# EAGLE board Battery_Monitoring_V2 (EAGLE 9.5.1)
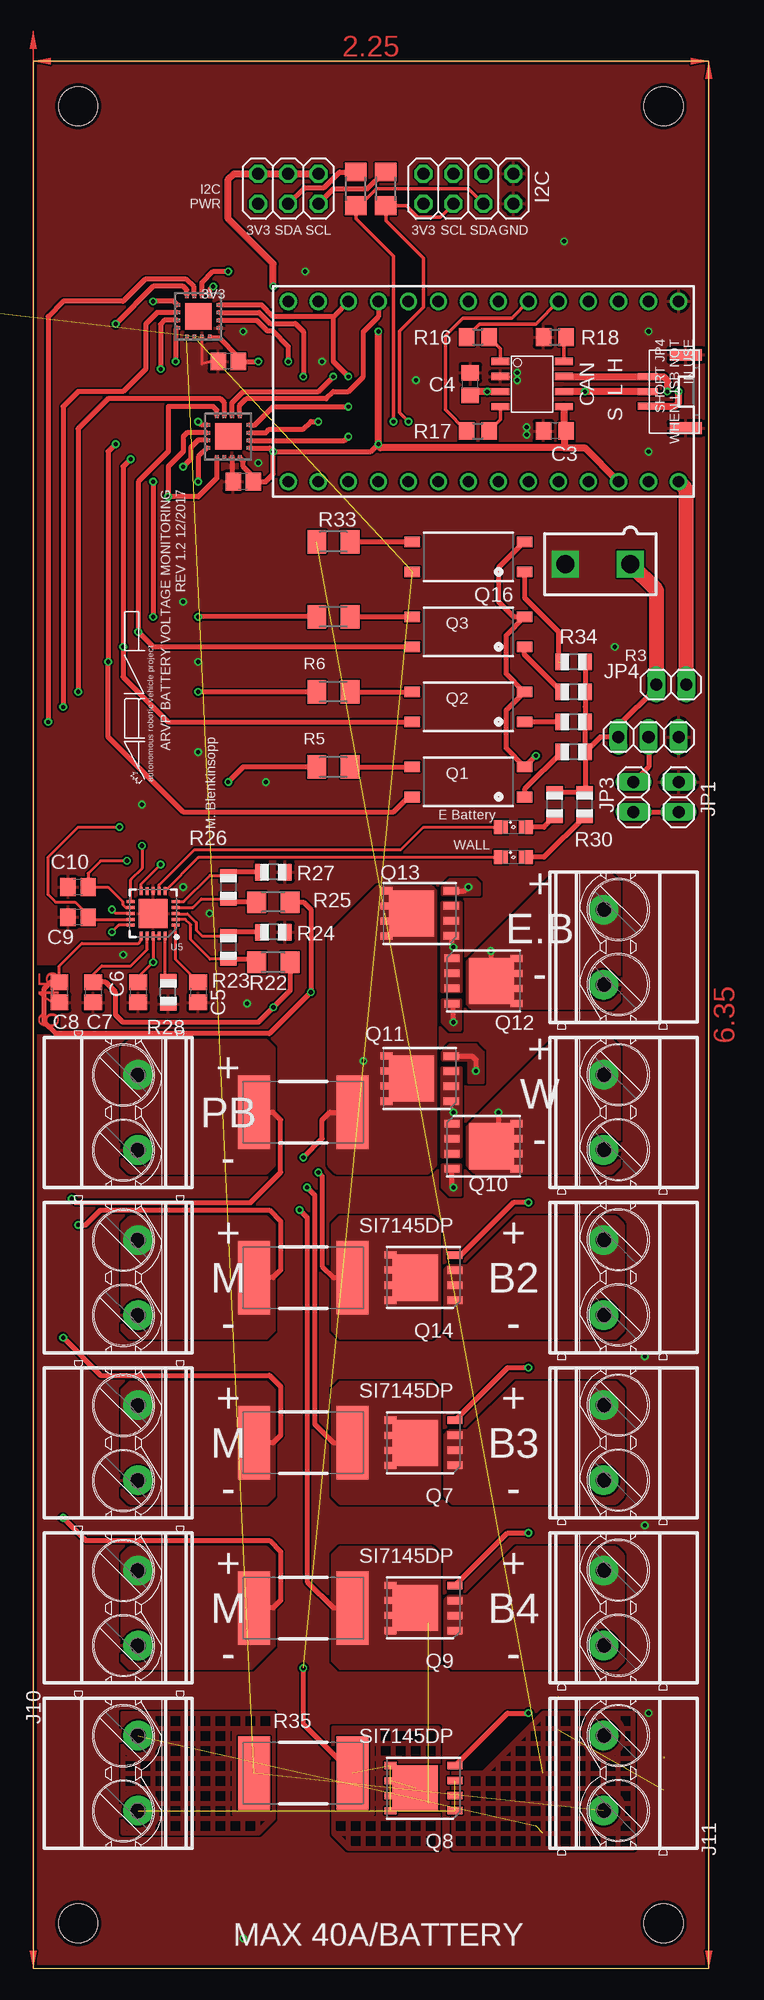
[diagram p0: board, top side]
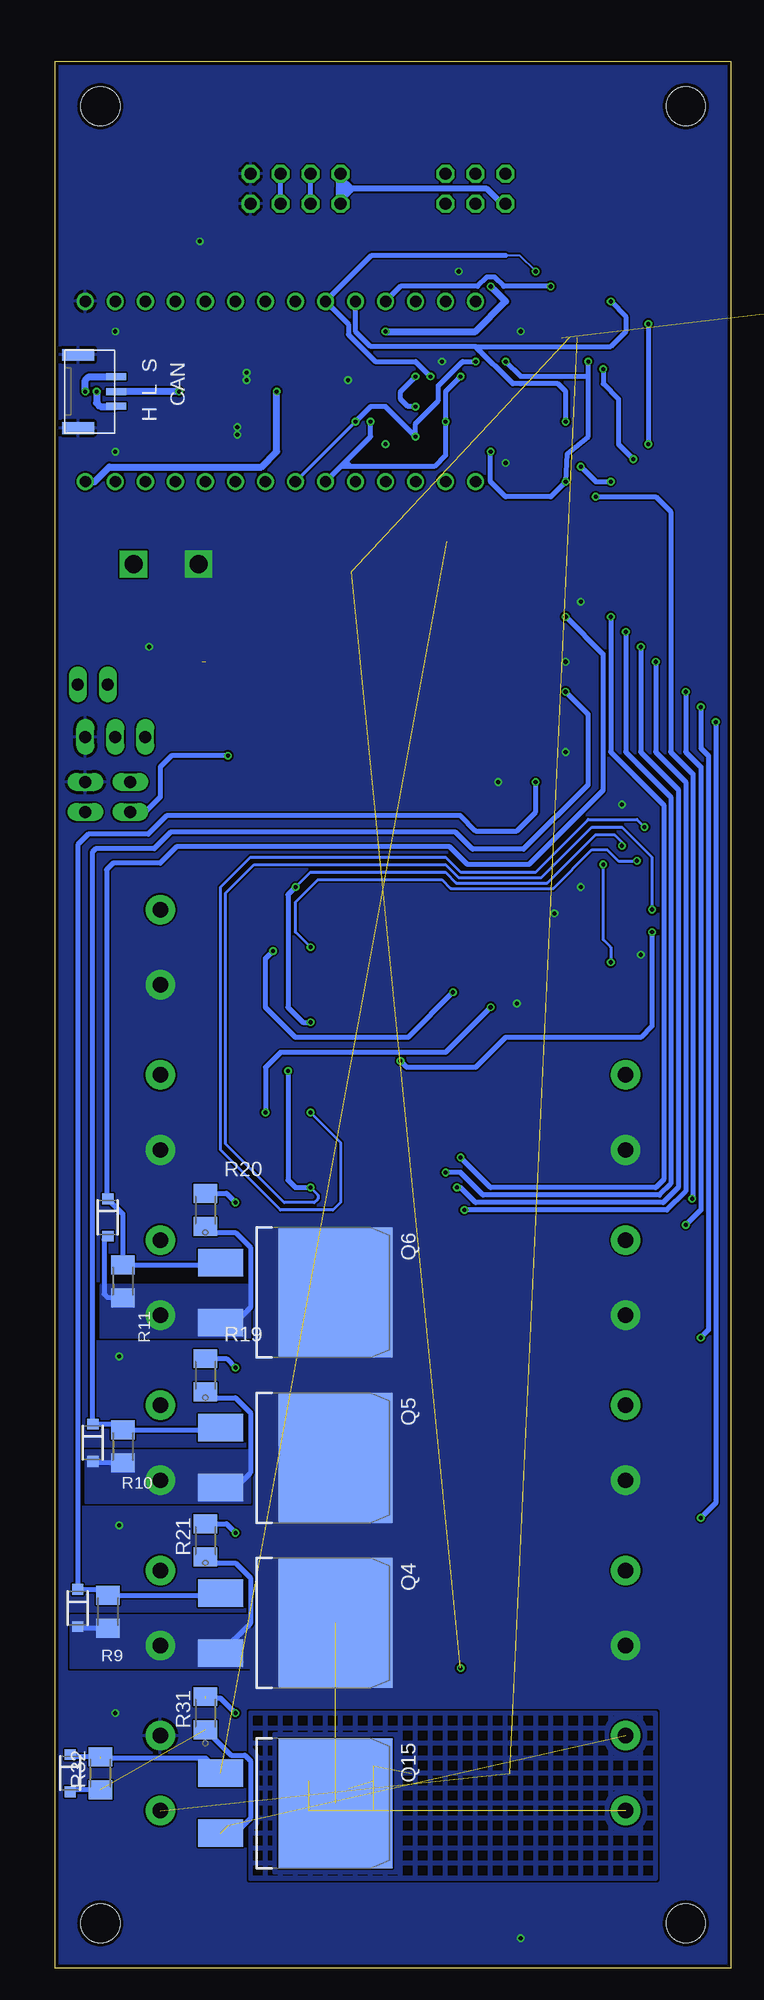
[diagram p1: board, bottom side, seen from below]

Size 57.15 x 161.29 mm. Coordinates in mm from the lower left corner, seen from the top.
Outline: 57.15,0 57.15,161.29 0,161.29 0,0 57.15,0
Copper layers (1+2*15+16): Top 0.035mm / dielectric 1.5mm / Route2 0.035mm / dielectric 0.15mm / Route15 0.035mm / dielectric 0.2mm / Bottom 0.035mm
Design rules "JLCPCB2Layer *": minimum track width 6mil, minimum drill 10mil, track to track 6mil, track to pad 6mil, pad to pad 6mil, via to via 6mil, smd to smd 0mil, copper to edge 10mil, drill to drill 10mil, minimum pad ring 6mil, minimum via ring 6mil, stop-mask expansion 2mil, vias tented up to drill 100mil, thermal gap 10mil
Net classes: 1 net1: clearance 0.203 mm to class 0
Milling: 4 lines

## Footprints (pad centres in the part's own frame; a part is rotated, then mirrored left to right if it is on the bottom)
C2012 = smd 1.3 x 1.5: 1 -0.85,0; 2 0.85,0
C0805 = smd 1.3 x 1.5: 1 -0.95,0; 2 0.95,0
C0805' = smd 1.3 x 1.5: 1 -0.85,0; 2 0.85,0
5566-2 = drill 1.524 square: 1 0,-2.756; 2 0,2.756
SM03B-GHS-TB = smd 0.6 x 1.7: P$1 -1.25,0.85; P$2 0,0.85; P$3 1.25,0.85 | smd 1 x 2.7: P$4 -3.1,-2.35; P$5 3.1,-2.35
SOD-123 = smd 0.9 x 0.95: P$1 -1.575,0; P$2 1.575,0
MKDS_5/2-6,35 = drill 1.3 pad 2.5: 1 -3.175,0; 2 3.175,0
1X02 = drill 1.016 long: 1 -1.27,0; 2 1.27,0
1X03 = drill 1.016 long: 1 -2.54,0; 2 0,0; 3 2.54,0
2X03 = drill 1.016 octagon: 1 -2.54,-1.27; 2 -2.54,1.27; 3 0,-1.27; 4 0,1.27; 5 2.54,-1.27; 6 2.54,1.27
2X04 = drill 1.016 octagon: 1 -3.81,-1.27; 2 -3.81,1.27; 3 -1.27,-1.27; 4 -1.27,1.27; 5 1.27,-1.27; 6 1.27,1.27; 7 3.81,-1.27; 8 3.81,1.27
SML0805 = smd 1.2 x 1.2: A 1.05,0; C -1.05,0
SOP-4L = smd 1.3 x 0.9: P$1 -4.75,1.27; P$2 -4.75,-1.27; P$3 4.75,-1.27; P$4 4.75,1.27
SOT404/D2PAK = smd 2.32 x 3.81: 1G -2.54,-6.32; 3S 2.54,-6.32 | smd 11 x 9.65: 2D 0,3.4
SO-8/PPAK/TEST = smd 1.02 x 0.61: D@1 2.795,-1.905; D@2 2.795,-0.635; D@3 2.795,0.635; D@4 2.795,1.905 | smd 3.81 x 3.91: D@5 0.69,0 | smd 1.27 x 0.635: G -2.67,-1.905; S@1 -2.67,1.905; S@2 -2.67,0.635; S@3 -2.67,-0.635
R0805 = smd 1.1 x 1.4: 1 -1,0; 2 1,0
3920 = smd 2.7 x 6.2: P$1 -4.15,0; P$2 4.15,0
M1206 = smd 1.6 x 2: 1 -1.4,0; 2 1.4,0
R1206 = smd 1.6 x 1.803: 1 -1.422,0; 2 1.422,0
R0805' = smd 1.3 x 1.5: 1 -0.95,0; 2 0.95,0
HVQFN16_4X4 = smd 0.5 x 0.3: 1 -1.8,0.975; 2 -1.8,0.325; 3 -1.8,-0.325; 4 -1.8,-0.975; 9 1.8,-0.975; 10 1.8,-0.325; 11 1.8,0.325; 12 1.8,0.975 | smd 0.3 x 0.5: 5 -0.975,-1.8; 6 -0.325,-1.8; 7 0.325,-1.8; 8 0.975,-1.8; 13 0.975,1.8; 14 0.325,1.8; 15 -0.325,1.8; 16 -0.975,1.8 | smd 2.25 x 2.25: TH 0,0
TEENSY_3.1_BASIC_2 = drill 0.965: 0 -7.62,13.97; 1 -7.62,11.43; 2 -7.62,8.89; 3 -7.62,6.35; 3.3V 7.62,11.43; 4 -7.62,3.81; 5 -7.62,1.27; 6 -7.62,-1.27; 7 -7.62,-3.81; 8 -7.62,-6.35; 9 -7.62,-8.89; 10 -7.62,-11.43; 11 -7.62,-13.97; 12 -7.62,-16.51; 13 7.62,-16.51; 14/A0 7.62,-13.97; 15/A1 7.62,-11.43; 16/A2 7.62,-8.89; 17/A3 7.62,-6.35; 18/A4 7.62,-3.81; 19/A5 7.62,-1.27; 20/A6 7.62,1.27; 21/A7 7.62,3.81; 22/A8 7.62,6.35; 23/A9 7.62,8.89; AGND 7.62,13.97; GND -7.62,16.51; VIN 7.62,16.51
SO-8 = smd 1.524 x 0.61: 1 -2.692,1.905; 2 -2.692,0.635; 3 -2.692,-0.635; 4 -2.692,-1.905; 5 2.692,-1.905; 6 2.692,-0.635; 7 2.692,0.635; 8 2.692,1.905
20-QFN(4X4) = smd 0.25 x 0.7: !SHDN -0.5,1.9; !VALID1 -1,-1.9; !VALID2 -0.5,-1.9; CAS 0.5,-1.9; EN 0,1.9; GND@1 0,-1.9; HYS -1,1.9; INTVCC 1,-1.9; V1 0.5,1.9; V2 1,1.9 | smd 0.7 x 0.25: G1 1.9,0; G2 1.9,-1; OV1 -1.9,0; OV2 -1.9,-1; TMR -1.9,1; UV1 -1.9,0.5; UV2 -1.9,-0.5; VOUT 1.9,1; VS1 1.9,0.5; VS2 1.9,-0.5 | smd 2.45 x 2.45: GND@2 0,0
STAND-OFF = hole 3.302: 0,0

## Placement (x,y rotation side)
ARVP1  ARVP_LOGO  [ARVP]  10.16,100.33 90 top
C1  0.1microF  [C2012]  16.51,135.89 180 top
C2  0.1microF  [C2012]  17.78,125.73 180 top
C3  10u  [C0805]  44.13,130.02 180 top
C4  10u  [C0805]  36.99,133.98 90 top
C5  1n  [C0805']  13.97,82.55 270 top
C6  0.1u  [C0805']  8.89,82.55 270 top
C7  0.1u  [C0805']  5.08,82.55 270 top
C8  0.1u  [C0805']  2.22,82.55 270 top
C9  0.1u  [C0805']  3.81,88.9 180 top
C10  0.1u  [C0805']  3.81,91.44 180 top
CON1  MOLEX_5566-2  [5566-2]  47.78,118.75 90 top
CON2  SM03B-GHS-TB  [SM03B-GHS-TB]  52.86,133.35 90 top
CON3  SM03B-GHS-TB  [SM03B-GHS-TB]  52.86,133.35 270 bottom
D1  BZT52C10  [SOD-123]  55.25,30.48 270 bottom
D2  BZT52C10  [SOD-123]  53.97,44.45 270 bottom
D3  BZT52C10  [SOD-123]  52.7,63.5 270 bottom
D4  BZT52C10  [SOD-123]  55.88,16.51 270 bottom
J1  MKDS_5/2-6,352  [MKDS_5/2-6,35]  48.26,86.36 90 top
J2  MKDS_5/2-6,352  [MKDS_5/2-6,35]  48.26,58.42 90 top
J3  MKDS_5/2-6,352  [MKDS_5/2-6,35]  48.26,44.45 90 top
J4  MKDS_5/2-6,352  [MKDS_5/2-6,35]  48.26,30.48 90 top
J5  MKDS_5/2-6,352  [MKDS_5/2-6,35]  8.89,30.48 270 top
J6  MKDS_5/2-6,352  [MKDS_5/2-6,35]  8.89,44.45 270 top
J7  MKDS_5/2-6,352  [MKDS_5/2-6,35]  8.89,58.42 270 top
J8  MKDS_5/2-6,352  [MKDS_5/2-6,35]  8.89,72.39 270 top
J9  MKDS_5/2-6,352  [MKDS_5/2-6,35]  48.26,72.39 90 top
J10  MKDS_5/2-6,352  [MKDS_5/2-6,35]  8.89,16.51 270 top
J11  MKDS_5/2-6,352  [MKDS_5/2-6,35]  48.26,16.51 90 top
JP1  [1X02]  54.61,99.06 90 top
JP2  [1X03]  52.07,104.14 0 top
JP3  [1X02]  50.8,99.06 90 top
JP4  [1X02]  53.97,108.59 180 top
JP5  [2X03]  21.59,150.5 180 top
JP6  [2X04]  36.83,150.5 180 top
LED1  2.65  [SML0805]  40.64,96.52 0 top
LED2  2.65  [SML0805]  40.64,93.98 0 top
Q1  TCLD1000CT  [SOP-4L]  36.83,100.33 180 top
Q2  TCLD1000CT  [SOP-4L]  36.83,106.68 180 top
Q3  TCLD1000CT  [SOP-4L]  36.83,113.03 180 top
Q4  PSMN1R5-30BLE  [SOT404/D2PAK]  36.83,29.21 270 bottom
Q5  PSMN1R5-30BLE  [SOT404/D2PAK]  36.83,43.18 270 bottom
Q6  PSMN1R5-30BLE  [SOT404/D2PAK]  36.83,57.15 270 bottom
Q7  SI7145DP  [SO-8/PPAK/TEST]  33.02,44.45 180 top
Q8  SI7145DP  [SO-8/PPAK/TEST]  33.02,15.24 180 top
Q9  SI7145DP  [SO-8/PPAK/TEST]  33.02,30.48 180 top
Q10  SI7145DP  [SO-8/PPAK/TEST]  38.1,69.53 0 top
Q11  SI7145DP  [SO-8/PPAK/TEST]  32.7,75.25 180 top
Q12  SI7145DP  [SO-8/PPAK/TEST]  38.1,83.5 0 top
Q13  SI7145DP  [SO-8/PPAK/TEST]  32.7,89.22 180 top
Q14  SI7145DP  [SO-8/PPAK/TEST]  33.02,58.42 180 top
Q15  PSMN1R5-30BLE  [SOT404/D2PAK]  36.83,13.97 270 bottom
Q16  TCLD1000CT  [SOP-4L]  36.83,119.38 180 top
R1  1k  [R0805]  45.72,102.87 180 top
R2  1k  [R0805]  45.72,105.41 180 top
R3  1k  [R0805]  45.72,107.95 180 top
R4  0.001Ohm  [3920]  22.86,44.45 0 top
R5  1k  [M1206]  25.4,101.6 0 top
R6  1k  [M1206]  25.4,107.95 0 top
R7  1k  [M1206]  25.4,114.3 0 top
R8  0.001Ohm  [3920]  22.86,30.48 0 top
R9  10k  [M1206]  52.7,30.16 90 bottom
R10  10k  [M1206]  51.44,44.13 90 bottom
R11  10k  [M1206]  51.44,58.1 90 bottom
R12  0.001Ohm  [3920]  22.86,72.39 0 top
R13  0.001Ohm  [3920]  22.86,58.42 0 top
R14  10k  [R1206]  29.84,150.5 270 top
R15  10k  [R1206]  27.31,150.5 270 top
R16  220  [R0805']  37.62,137.95 0 top
R17  220  [R0805']  37.62,130.02 0 top
R18  1k  [R0805']  44.13,137.95 0 top
R19  10k  [M1206]  44.45,50.16 90 bottom
R20  10k  [M1206]  44.45,64.13 90 bottom
R21  10k  [M1206]  44.45,36.2 90 bottom
R22  249k  [R1206]  20.32,85.09 0 top
R23  12.4k  [R0805]  16.51,86.36 270 top
R24  9.09k  [R0805]  20.32,87.63 180 top
R25  249k  [R1206]  20.32,90.17 0 top
R26  12.4k  [R0805]  16.51,91.44 270 top
R27  9.09k  [R0805]  20.32,92.71 180 top
R28  158k  [R0805]  11.43,82.55 90 top
R29  2.32k  [R0805]  44.13,98.42 90 top
R30  2.32k  [R0805]  46.67,98.42 90 top
R31  10k  [M1206]  44.45,21.59 90 bottom
R32  10k  [M1206]  53.34,16.51 90 bottom
R33  1k  [M1206]  25.4,120.65 0 top
R34  1k  [R0805]  45.72,110.49 180 top
R35  0.001Ohm  [3920]  22.86,16.51 0 top
U1  INA3221.  [HVQFN16_4X4]  13.97,139.7 90 top
U2  INA3221.  [HVQFN16_4X4]  16.51,129.54 90 top
U3  TEENSY_3.1_BASIC_2  [TEENSY_3.1_BASIC_2]  38.1,133.35 270 top
U4  TCAN1042HVDR  [SO-8]  42.23,133.98 0 top
U5  LTC4418  [20-QFN(4X4)]  10.16,89.22 180 top
U$9  [LETTER_P]  -63.5,-39.37 0 top  (outside the outline)
U$15  [DOCFIELD]  121.92,-29.21 0 top  (outside the outline)
U$18  [STAND-OFF]  53.34,157.48 90 top
U$24  [STAND-OFF]  53.34,3.81 90 top
U$25  [STAND-OFF]  3.81,3.81 90 top
U$26  [STAND-OFF]  3.81,157.48 90 top

## Library data of the parts
ARVP1 CON1-CON3 U4 = ARVP
C1 C2 = resistor
C3 C4 R14-R18 = rcl
C5-C10 R1-R3 R5-R7 R9-R11 R22-R30 R32-R34 = adafruit
D1-D4 J1-J11 Q2-Q6 Q10-Q13 Q15 Q16 R4 R8 R12 R13 R35 U5 = Moira
JP1-JP6 = pinhead
LED1 LED2 = led
Q1 = Moira; SPICEPREFIX: E
Q7-Q9 Q14 = Si7145DP; MPN: SI7145DP-T1-GE3; OC_NEWARK: 63R6006
R19-R21 R31 = adafruit; MPN: RC0603FR-0710KL; OC_NEWARK: 68R0049
U1 U2 = INA3221
U3 = Teensy_3_Series_Board_v1.0
U$9 U$15 = frames
U$18 U$24-U$26 = SparkFun

## Nets
!VALID1: LED2.C U5.!VALID1
!VALID2: LED1.C U5.!VALID2
+3V3: C1.1 C2.1 C3.1 JP5.1 JP5.3 JP5.5 U1.4 U1.16 U2.4 U2.5 U2.16 U3.3.3V U4.5
+5V: CON1.1 JP2.1 JP4.2 R1.1 R2.1 R3.1 R29.2 R30.2 R34.1
AGND: U3.AGND
BATT1GND: D1.P$2 J4.1 Q4.3S R9.1 R21.1
BATT2GND: D2.P$2 J3.1 Q5.3S R10.1 R19.1
BATT3GND: D3.P$2 J2.1 Q6.3S R11.1 R20.1
BATT5GND: D4.P$2 J10.1 Q15.3S R31.1 R32.1
BATTERY1: C8.1 J1.2 Q12.D@1 Q12.D@2 Q12.D@3 Q12.D@4 Q12.D@5 R25.2 U5.V2
BATTERY2_IN: J2.2 Q14.S@1 Q14.S@2 Q14.S@3
BATTERY3_IN: J3.2 Q7.S@1 Q7.S@2 Q7.S@3
BATTERY4_IN: J4.2 Q9.S@1 Q9.S@2 Q9.S@3
BATTERY5_IN: J10.2 Q8.S@1 Q8.S@2 Q8.S@3
BATTERY_2: Q3.P$4 Q14.D@1 Q14.D@2 Q14.D@3 Q14.D@4 Q14.D@5 R13.P$2 U2.12
BATTERY_3: Q2.P$4 Q7.D@1 Q7.D@2 Q7.D@3 Q7.D@4 Q7.D@5 R4.P$2 U1.15
BATTERY_4: Q1.P$4 Q9.D@1 Q9.D@2 Q9.D@3 Q9.D@4 Q9.D@5 R8.P$2 U1.12
BATTERY_5: Q8.D@1 Q8.D@2 Q8.D@3 Q8.D@4 Q8.D@5 Q16.P$4 R35.P$2 U1.2
CAN_RX1: R17.2 U4.4
CAN_RX_T: R17.1 U3.4
CAN_TX2: R16.2 U4.1
CAN_TX_T: R16.1 U3.3
CANH1: CON2.P$3 CON3.P$3 U4.7
CANL1: CON2.P$2 CON3.P$2 U4.6
CANSH1: CON2.P$1 CON3.P$1
CRITICAL_OUT: U1.9 U2.9 U3.9
E1: Q1.P$3 R5.2
E2: Q2.P$3 R6.2
E3: Q3.P$3 R7.2
ELECTRONICS_BATTERY: Q11.D@1 Q11.D@2 Q11.D@3 Q11.D@4 Q11.D@5 Q13.D@1 Q13.D@2 Q13.D@3 Q13.D@4 Q13.D@5 R12.P$2 U2.15 U5.VOUT
G1: Q10.G Q11.G U5.G1
G2: Q12.G Q13.G U5.G2
GND: C1.2 C2.2 C3.2 C4.2 C5.2 C6.2 C7.2 C8.2 C9.2 C10.2 CON1.2 CON2.P$4 CON2.P$5 CON3.P$4 CON3.P$5 J1.1 J5.2 J6.2 J7.2 J8.2 J9.1 J11.2 JP1.2 JP2.3 JP6.1 JP6.2 Q4.2D Q5.2D Q6.2D Q15.2D R18.1 R24.1 R27.1 R28.1 U1.3 U1.5 U2.3 U3.GND U4.2 U5.GND@1 U5.GND@2
HYS: R28.2 U5.HYS
I2C_3V1: JP5.6 JP6.7 JP6.8
MG1: D1.P$1 Q4.1G R5.1 R9.2
MG2: D2.P$1 Q5.1G R6.1 R10.2
MG3: D3.P$1 Q6.1G R7.1 R11.2
MG4: D4.P$1 Q15.1G R32.2 R33.1
MOTOR1: J5.1 R8.P$1 U1.11
MOTOR2: J6.1 R4.P$1 U1.14
MOTOR3: J7.1 R13.P$1 U2.11
MOTOR4: J11.1 R35.P$1 U1.1
N$1: Q1.P$1 R1.2
N$2: Q2.P$1 R2.2
N$3: Q3.P$1 R3.2
N$4: JP1.1 JP3.1 Q1.P$2 Q2.P$2 Q3.P$2 Q16.P$2
N$5: JP2.2 JP3.2
N$6: Q7.G R19.2
N$7: Q14.G R20.2
N$8: LED1.A R29.1
N$9: Q9.G R21.2
N$10: Q8.G R31.2
N$11: LED2.A R30.1
N$14: C5.1 U5.TMR
N$15: Q16.P$3 R33.2
N$16: Q16.P$1 R34.2
NIU: C6.1 U5.!SHDN U5.EN U5.INTVCC
OV1: R23.1 R24.2 U5.OV1
OV2: R26.1 R27.2 U5.OV2
POWER_BOARD: J8.1 R12.P$1 U2.1 U2.14
PV_OUT: U1.10 U2.10 U3.7
SCL: JP6.5 JP6.6 R14.2 U1.6 U2.6 U3.19/A5
SCL_3V1: JP5.2 R14.1
SDA: JP6.3 JP6.4 R15.2 U1.7 U2.7 U3.18/A4
SDA_3V1: JP5.4 R15.1
STB1: R18.2 U4.8
TC_OUT: U1.13 U2.13 U3.8
UV1: R22.1 R23.2 U5.UV1
UV2: R25.1 R26.2 U5.UV2
VIN: C4.1 JP4.1 U3.VIN U4.3
VS1: C9.1 Q10.S@1 Q10.S@2 Q10.S@3 Q11.S@1 Q11.S@2 Q11.S@3 U5.VS1
VS2: C10.1 Q12.S@1 Q12.S@2 Q12.S@3 Q13.S@1 Q13.S@2 Q13.S@3 U5.VS2
WALL: C7.1 J9.2 Q10.D@1 Q10.D@2 Q10.D@3 Q10.D@4 Q10.D@5 R22.2 U5.V1
WARNING_OUT: U1.8 U2.8 U3.10

## Tracks (layer width: path | path; a pad name or v marks a point on that pad's centre or on a via)
!VALID1
  Top 0.254: U5.!VALID1 13.97,93.93 13.97,93.98 LED2.C
!VALID2
  Top 0.254: U5.!VALID2 10.66,91.62 13.65,94.62 31.11,94.62 33.02,96.52 LED1.C
+3V3  (via drill 0.35)
  Top 0.406: U2.4 17.78,127.44 17.78,127 18.63,126.15 C2.1 19.69,125.73 20.32,126.37 v20.32,128.27 | U1.4 15.77,137.9 17.36,136.31 C1.1 v19.05,135.89 | U1.16 12.06,138.62 v12.06,135.89 | U2.16 13.97,127.82 v13.97,125.73 | v20.32,128.27 20.03,128.56 U2.5 | v20.32,128.27 28.58,128.27 v29.21,128.91
  Top 0.61: JP5.1 JP5.3 JP5.5 16.99,151.76 16.51,151.29 16.51,147.95 20.32,144.14 v20.32,142.24 | U3.3.3V 46.67,128.59 44.93,128.59 | 44.93,128.59 29.37,128.59 29.21,128.75 v29.21,128.91 v29.21,138.43 | U4.5 44.92,130.18 C3.1 44.93,129.86 44.93,128.59
  Bottom 0.406: 12.06,134.62 v12.06,135.89 | 12.06,134.62 17.78,134.62 v19.05,135.89 | v20.32,128.27 20.32,125.73 19.05,124.46 15.24,124.46 v13.97,125.73 13.81,128.11 12.06,129.54 12.06,134.62
  Bottom 0.61: v20.32,142.24 19.05,140.97 21.59,138.43 v29.21,138.43
+5V
  Top 0.406: JP4.2 52.7,108.27 49.53,105.09 JP2.1 47.99,104.14 R1.1 | R1.1 46.72,99.47 R30.2 R29.2 | R1.1 R2.1 46.72,106.68 R3.1 R34.1
  Top 1.27: CON1.1 52.7,116.58 JP4.2
BATT1GND
  Bottom 0.406: Q4.3S 40.64,29.18 40.64,33.02 41.91,34.29 43.94,34.29 R21.1 | R9.1 55.1,28.76 D1.P$2
  pour Bottom (no thermals): 55.88,29.85 55.88,25.4 40.64,25.4 40.64,29.85
BATT2GND
  Bottom 0.406: R10.1 53.83,42.73 D2.P$2 | R19.1 43.94,48.26 41.91,48.26 40.64,46.99 40.64,41.91 41.91,40.64 Q5.3S
  pour Bottom (no thermals): 54.61,43.82 54.61,39.37 40.64,39.37 40.64,43.82
BATT3GND
  Bottom 0.406: D3.P$2 53.02,61.61 53.02,57.02 52.7,56.7 R11.1 | R20.1 43.94,62.23 41.91,62.23 40.64,60.96 40.64,55.88 41.91,54.61 Q6.3S
  pour Bottom (no thermals): 53.34,57.79 53.34,53.34 40.64,53.34 40.64,57.79
BATT5GND  (3 unrouted)
  Bottom 0.406: R32.1 55.7,15.11 D4.P$2 | R31.1 42.29,18.03 41.1,18.03 40.64,17.57 40.64,12.7 41.91,11.43 42.55,12.07
BATTERY1  (via drill 0.35)
  Top 0.254: C8.1 2.22,84.77 4.13,86.68 8.89,86.68 9.16,86.95 U5.V2
  Top 0.406: R25.2 22.86,90.17 23.5,89.53 v23.5,82.55 20,79.06 1.91,79.06 0.95,80.01 0.95,82.87 1.48,83.4 C8.1 | v38.73,86.04 38.73,83.56 Q12.D@5
  Bottom 0.406: v23.5,82.55 27.31,78.74 36.83,78.74 39.37,81.28 39.37,85.41 v38.73,86.04
  pour Top (no thermals): 48.89,81.28 37.15,81.28 36.83,81.6 36.83,85.09 44.13,92.39 48.89,92.39 49.53,91.76 49.53,81.91
BATTERY2_IN
  pour Top (no thermals): 49.85,62.87 49.85,53.98 49.21,53.34 35.56,53.34 34.92,53.98 34.92,59.05 35.24,59.37 36.83,59.37 40.96,63.5 49.21,63.5
BATTERY3_IN
  pour Top (no thermals): 49.85,48.9 49.85,40.01 49.21,39.37 35.56,39.37 34.92,40.01 34.92,45.09 35.24,45.4 36.83,45.4 40.96,49.53 49.21,49.53
BATTERY4_IN
  pour Top (no thermals): 49.85,34.93 49.85,26.04 49.21,25.4 35.56,25.4 34.92,26.04 34.92,31.12 35.24,31.43 36.83,31.43 40.96,35.56 49.21,35.56
BATTERY5_IN  (3 unrouted)
BATTERY_2  (via drill 0.35)
  Top 0.406: U2.12 15.53,131.78 15.24,132.08 11.43,132.08 11.43,128.27 8.89,125.73 v8.89,113.03 10.16,111.76 Q3.P$4 | v24.13,67.31 24.45,66.99 24.45,59.37 25.4,58.42 R13.P$2
  Bottom 0.406: v8.89,113.03 8.89,102.87 5.08,99.06 5.08,66.36 6.03,65.41 20.95,65.41 22.86,67.31 v24.13,67.31
  pour Top (no thermals): 34.29,62.87 34.29,53.98 33.66,53.34 26.03,53.34 25.4,53.98 25.4,62.87 26.03,63.5 33.66,63.5
BATTERY_3  (via drill 0.35)
  Top 0.406: U1.15 11.11,139.38 10.77,139.04 10.77,135.28 v10.8,135.25 | v8.25,127.63 7.62,127 v7.62,111.76 7.62,109.22 11.43,105.41 Q2.P$4 | R4.P$2 25.4,44.45 23.81,46.04 23.81,65.41 v23.18,66.04
  Bottom 0.406: v10.8,135.25 10.8,134 9.51,132.72 9.51,128.89 v8.25,127.63 | v7.62,111.76 7.62,102.87 4.44,99.69 4.44,66.04 5.72,64.77 21.59,64.77 22.86,66.04 v23.18,66.04
  pour Top (no thermals): 34.29,48.9 34.29,40.01 33.66,39.37 26.03,39.37 25.4,40.01 25.4,48.9 26.03,49.53 33.66,49.53
BATTERY_4  (via drill 0.35)
  Top 0.406: U1.12 13,141.94 12.7,142.24 10.16,142.24 v6.98,139.06 | v6.98,128.91 6.35,128.27 v6.35,110.49 6.35,104.14 12.7,97.79 30.48,97.79 31.75,99.06 Q1.P$4 | R8.P$2 25.4,30.48 23.18,32.7 23.18,63.5 v22.54,64.13
  Bottom 0.406: v6.98,139.06 v6.98,128.91 | v6.35,110.49 6.35,102.87 3.81,100.33 3.81,65.72 5.4,64.13 v22.54,64.13
  pour Top (no thermals): 34.29,34.93 34.29,26.04 33.66,25.4 26.03,25.4 25.4,26.04 25.4,34.93 26.03,35.56 33.66,35.56
BATTERY_5  (via drill 0.35)  (7 unrouted)
  Top 0.406: R35.P$2 22.86,20.66 v22.86,25.4
CAN_RX1
  Top 0.305: U4.4 39.53,130.98 R17.2
CAN_RX_T
  Top 0.305: R17.1 34.88,131.81 34.88,138.06 36.38,139.57 40.51,139.57 U3.4
CAN_TX2
  Top 0.305: U4.1 39.53,136.99 R16.2
CAN_TX_T
  Top 0.305: U3.3 42.54,139.06 37.78,139.06 37.57,138.85 R16.1
CANH1  (via drill 0.35)
  Top 0.61: U4.7 51.99,134.62 CON2.P$3 53.36,134.6 53.66,134.3 v53.66,133.35
  Bottom 0.61: v53.66,133.35 53.66,132.4 53.34,132.08 52.03,132.08 CON3.P$3
CANL1  (via drill 0.35)
  Top 0.61: U4.6 v46.67,133.35 CON3.P$2
  Bottom 0.61: v46.67,133.35 CON3.P$2
CANSH1  (via drill 0.35)
  Top 0.61: CON2.P$1 54.31,132.1 54.61,132.4 v54.61,133.35
  Bottom 0.61: v54.61,133.35 54.61,134.3 54.31,134.6 CON3.P$1
CRITICAL_OUT  (via drill 0.35)
  Top 0.406: U1.9 14.94,141.94 v15.24,142.24 | U2.9 17.48,132.19 18.03,132.74 24.79,132.74 25.4,133.35 26.67,133.35 27.94,134.62 27.94,138.43 29.21,139.7 U3.9
  Bottom 0.406: v15.24,142.24 19.21,142.24 20,143.03 20.64,143.03 21.43,142.24 27.94,142.24 U3.9
E1
  Top 0.406: R5.2 Q1.P$3
E2
  Top 0.406: R6.2 Q2.P$3
E3
  Top 0.406: R7.2 Q3.P$3
ELECTRONICS_BATTERY  (via drill 0.35)
  Top 0.254: U5.VOUT 7.25,88.22 v6.67,87.63
  Top 0.406: U2.15 14.67,129.25 13.97,129.25 13.33,128.62 13.33,127.63 v12.7,127 | v10.16,125.73 v10.16,114.3 | v22.86,68.58 24.45,70.17 24.45,71.75 25.08,72.39 R12.P$2
  Bottom 0.406: v10.16,125.73 11.43,125.73 v12.7,127 | v10.16,114.3 10.16,102.87 5.69,98.4 5.69,66.7 6.35,66.04 20.32,66.04 v22.86,68.58 | v6.67,87.63 6.67,79.69 7.62,78.74 19.05,78.74 21.59,76.2 27.4,76.2 v27.94,76.74
  pour Top (no thermals): 29.21,91.44 33.66,91.44 33.97,91.12 33.97,67.94 33.34,67.31 25.72,67.31 25.08,67.94 25.08,87.31
G1  (via drill 0.35)
  Top 0.254: U5.G1 6.98,89.22 v6.67,89.53
  Top 0.406: v35.56,66.04 35.43,66.17 Q10.G | Q11.G 37.15,77.15 37.47,76.84 v37.47,75.88
  Bottom 0.254: v35.56,66.04 34.92,65.41 34.92,65.09 35.24,64.77 37.78,64.77 42.72,69.71 42.72,90.94 40.32,93.34 24.14,93.34 23.05,92.25 16.02,92.25 11.75,96.52 9.21,96.52 6.67,93.98 v6.67,89.53
  Bottom 0.406: v37.47,75.88 37.47,66.68 36.83,66.04 v35.56,66.04
  pour Top (no thermals): 35.24,78.1 34.61,77.47 34.61,76.84 36.83,76.84 36.83,74.93 38.1,74.93 38.1,77.47 37.47,78.1
  pour Top (no thermals): 34.61,66.04 35.24,65.41 36.19,65.41 36.19,67.94 34.61,67.94
G2  (via drill 0.35)
  Top 0.254: U5.G2 8.26,92.08 9.21,93.03 v9.21,94.93
  Top 0.406: Q13.G 36.51,91.12 v36.83,91.44 | v35.56,80.01 35.56,81.47 Q12.G
  Bottom 0.254: v36.83,91.44 35.56,92.71 24.15,92.71 23.24,91.8 15.52,91.8 11.43,95.88 9.84,95.88 9.21,95.25 v9.21,94.93
  Bottom 0.406: v36.83,91.44 37.47,90.81 37.47,81.28 36.19,80.01 v35.56,80.01
  pour Top (no thermals): 35.24,92.07 34.61,91.44 34.61,90.81 37.78,90.81 37.78,91.76 37.47,92.07
  pour Top (no thermals): 34.61,80.01 35.24,79.38 36.19,79.38 36.19,81.91 34.61,81.91
GND  (via drill 0.35)  (4 unrouted)
  Top 0.254: C1.2 15.56,135.98 14.31,135.74 14.3,135.7 U1.3
  Top 0.406: U2.3 16.83,125.82 C2.2
  other vias: 41.75,130.33 41.75,129.7 40.96,134.94 40.96,134.3 23.02,143.51 44.93,146.05 17.78,2.54 52.07,21.59 52.07,128.27 52.07,138.43 -12.7,143.51 7.62,85.72 18.1,81.6 14.92,89.22 12.7,115.57 13.97,102.87 19.69,100.33 49.21,111.76 -13.02,137.16 -8.89,140.65 19.05,127.32 17.78,138.43 32.39,134.3 24.45,135.89 9.21,98.42 51.75,51.75 51.75,37.46 12.7,91.44 13.97,110.49
  pour Top (no thermals): 47.15,117.32 47.15,120.17 43.02,120.17 43.02,117.32
  pour Bottom (no thermals): 47.15,117.32 47.15,120.17 43.02,120.17 43.02,117.32
  pour Bottom (rank 2): 56.83,0.32 56.83,160.97 0.32,160.97 0.32,0.32
  pour Top (rank 3): 56.83,0.32 56.83,160.97 0.32,160.97 0.32,0.32
  pour Bottom (no thermals): 6.35,71.12 6.35,66.68 11.43,66.68 11.43,71.12
  pour Bottom (no thermals): 46.36,85.09 46.36,81.28 50.17,81.28 50.17,85.09
  pour Bottom (no thermals): 39.37,49.53 39.37,36.83 6.35,36.83 6.35,49.53
  pour Bottom (no thermals): 39.37,63.5 39.37,50.8 6.35,50.8 6.35,63.5
  pour Bottom (no thermals): 40.64,35.56 40.64,22.86 6.35,22.86 6.35,35.56
  pour Bottom (no thermals): 46.36,71.12 46.36,67.31 50.17,67.31 50.17,71.12
HYS
  Top 0.254: R28.2 11.16,83.82 U5.HYS
I2C_3V1
  Bottom 0.508: JP5.6 19.37,149.22 20.64,150.5 33.02,150.5 | 33.02,151.45 32.07,150.5 33.02,149.54
  Bottom 0.813: JP6.7 33.02,151.45 33.02,150.5 33.02,149.54 JP6.8
MG1  (via drill 0.35)
  Top 0.406: R5.1 17.78,101.6 v16.51,100.33
  Bottom 0.406: v16.51,100.33 16.51,97.79 18.1,96.2 21.59,96.2 22.86,97.47 47.72,97.47 49.28,95.91 54.36,95.91 55.25,95.02 D1.P$1 53.2,32.05 R9.2 43.34,31.56 Q4.1G
MG2  (via drill 0.35)
  Top 0.406: R6.1 v13.97,107.95
  Bottom 0.406: v13.97,107.95 12.09,106.07 12.09,100.08 17.53,94.64 21.84,94.64 23.29,96.09 47.38,96.09 48.77,94.69 53.72,94.69 54.03,94.39 54.03,46.08 D2.P$1 51.93,46.02 R10.2 43.34,45.53 Q5.1G
MG3  (via drill 0.35)
  Top 0.406: R7.1 v13.97,114.3
  Bottom 0.406: v13.97,114.3 10.82,111.15 10.82,99.62 17.07,93.37 22.3,93.37 23.8,94.87 46.87,94.87 48.27,93.47 52.26,93.47 52.81,92.93 52.81,65.18 D3.P$1 51.44,63.8 R11.2 43.34,59.5 Q6.1G
MG4  (2 unrouted)
  Bottom 0.406: Q15.1G 44.42,17.78 53.34,17.78 | R32.2 55.7,17.91 D4.P$1
MOTOR1  (via drill 0.35)
  Top 0.406: U1.11 13.61,141.54 13.61,142.2 12.95,142.85 9.5,142.85 7.62,140.97 2.54,140.97 1.27,139.7 v1.27,105.41 | R8.P$1 20.32,30.48 20.95,31.12 20.95,35.24 20,36.2 4.44,36.2 v2.54,38.1
  Bottom 0.406: v2.54,38.1 1.27,39.37 v1.27,105.41
  pour Top (no thermals): 18.42,25.4 8.25,25.4 7.62,26.04 7.62,34.93 8.25,35.56 19.69,35.56 20.32,34.93 20.32,27.3
MOTOR2  (via drill 0.35)
  Top 0.406: U1.14 10.48,140.03 9.53,139.06 9.53,135.25 7.62,133.35 3.81,133.35 2.54,132.08 v2.54,106.68 | v2.54,53.34 5.72,50.16 20,50.16 20.95,49.21 20.95,45.09 20.32,44.45 R4.P$1
  Bottom 0.406: v2.54,53.34 1.91,53.98 1.91,102.55 2.54,103.19 v2.54,106.68
  pour Top (no thermals): 19.69,39.37 8.25,39.37 7.62,40.01 7.62,48.9 8.25,49.53 19.69,49.53 20.32,48.9 20.32,40.01
MOTOR3  (via drill 0.35)
  Top 0.406: U2.11 16.19,132.41 15.85,132.74 6.35,132.74 3.81,130.2 v3.81,107.95 | R13.P$1 20.32,58.42 20.95,59.05 20.95,63.18 20,64.13 5.72,64.13 4.44,62.87 v3.81,62.87
  Bottom 0.406: v3.81,107.95 3.81,102.87 2.54,101.6 2.54,64.13 v3.81,62.87
  pour Top (no thermals): 19.69,53.34 8.25,53.34 7.62,53.98 7.62,62.87 8.25,63.5 19.69,63.5 20.32,62.87 20.32,53.98
MOTOR4  (2 unrouted)
N$1
  Top 0.406: R1.2 41.58,99.73 Q1.P$1
N$2
  Top 0.406: R2.2 Q2.P$1
N$3
  Top 0.406: R3.2 41.58,111.09 Q3.P$1
N$4  (via drill 0.35)
  Top 0.406: JP3.1 JP1.1 | v42.55,102.55 42.53,102.55 Q1.P$2 41.58,101.61 40,103.19 40,106.38 Q2.P$2 40,109.53 40,112.72 Q3.P$2 40.64,114.3 39.37,115.57 39.37,118.44 Q16.P$2
  Bottom 0.406: v42.55,102.55 47.31,102.55 48.26,101.6 48.26,99.06 49.53,97.79 JP3.1
N$5
  Top 0.406: JP2.2 52.07,101.6 JP3.2
N$6  (via drill 0.35)
  Top 0.406: v41.91,50.8 40.14,50.8 Q7.G
  Bottom 0.406: R19.2 42.67,51.57 v41.91,50.8
N$7  (via drill 0.35)
  Top 0.406: v41.91,64.77 40.64,64.77 36.19,60.32 Q14.G
  Bottom 0.406: R20.2 42.67,65.53 v41.91,64.77
N$8
  Top 0.406: R29.1 43.23,96.52 LED1.A
N$9  (via drill 0.35)
  Top 0.406: Q9.G 40.14,36.83 v41.91,36.83
  Bottom 0.406: R21.2 42.67,37.6 v41.91,36.83
N$10  (via drill 0.35)  (1 unrouted)
  Top 0.406: Q8.G 40.14,21.59 v41.91,21.59
  Bottom 0.406: v41.91,21.59 43.18,22.86 44.45,22.86
N$11
  Top 0.406: R30.1 43.23,93.98 LED2.A
N$12
  pour Top (hatched): 7.62,21.59 20.32,21.59 20.32,12.7 19.05,11.43 7.62,11.43
N$13
  pour Top (hatched): 25.4,20.32 25.4,11.43 26.67,10.16 34.29,10.16 34.29,20.32
N$14
  Top 0.254: C5.1 12.06,85.31 U5.TMR
N$15
  Top 0.406: R33.2 Q16.P$3
N$16  (1 unrouted)
  Top 0.406: Q16.P$1 41.58,115.9 42.59,114.9 42.59,114.89 44.45,113.03 44.45,110.49
N$17
  pour Top (hatched): 35.56,16.51 35.56,10.16 50.8,10.16 50.8,21.59 43.18,21.59 38.1,16.51
N$18
  pour Bottom (hatched): 6.35,21.59 40.64,21.59 40.64,7.62 6.35,7.62
NIU  (via drill 0.35)
  Top 0.254: U5.!SHDN U5.EN v10.16,85.09 8.89,83.82 C6.1 | U5.INTVCC 9.16,91.71 v10.8,93.34
  Bottom 0.254: v10.16,85.09 10.16,86.36 10.8,87 v10.8,93.34
OV1
  Top 0.254: U5.OV1 12.1,89.17 13.07,89.17 13.79,88.45 13.79,87.81 14.29,87.31 16.46,87.31 R23.1
  Top 0.406: R24.2 16.78,87.63 R23.1
OV2
  Top 0.254: U5.OV2 12.75,90.22 14.97,92.44 R26.1
  Top 0.406: R27.2 16.78,92.71 R26.1
POWER_BOARD  (via drill 0.35)
  Top 0.406: U2.14 13.03,129.87 12.7,129.54 12.7,128.27 11.43,127 v11.43,124.46 13.97,124.46 15.53,126.03 U2.1 | R12.P$1 20.32,72.39 20.95,71.75 20.95,67.31 18.42,64.77 3.59,64.77 v3.27,65.09
  Bottom 0.406: v11.43,124.46 6.35,124.46 5.08,123.19 5.08,102.87 3.17,100.97 3.17,65.19 v3.27,65.09
  pour Top (no thermals): 19.69,67.31 8.25,67.31 7.62,67.94 7.62,77.79 8.25,78.42 19.69,78.42 20.32,77.79 20.32,67.94
PV_OUT  (via drill 0.35)
  Top 0.406: U1.10 14.3,142.56 15.24,143.51 v16.51,143.51 | U2.10 16.83,132.41 17.78,133.35 24.13,133.35 v25.4,134.62
  Bottom 0.152: 19.05,144.87 17.87,144.87 v16.51,143.51
  Bottom 0.406: v25.4,134.62 26.67,135.89 30.07,135.89 32.36,138.18 32.36,139.04 U3.7 30.39,144.87 19.05,144.87
SCL  (via drill 0.35)
  Top 0.305: v31.75,130.81 30.99,131.57 30.99,138.46 33.02,140.49 33.02,144.63 29.84,147.8 R14.2 31.59,149.07 32.56,148.11 34.44,148.11 JP6.6
  Top 0.406: U2.6 26.34,129.22 v26.67,129.54 | U1.6 18.92,139.38 19.81,138.48 20.27,138.48 21.59,137.16 v21.59,135.89
  Bottom 0.305: v31.75,130.81 U3.19/A5
  Bottom 0.406: JP6.6 JP6.5 | v31.75,130.81 30.48,132.08 29.21,132.08 v26.67,129.54 26.67,130.65 24.74,132.58 24.74,133.85 22.7,135.89 v21.59,135.89
SCL_3V1
  Top 0.406: JP5.2 25.4,150.5 28.26,150.5 29.68,151.92 R14.1
SDA  (via drill 0.35)
  Top 0.305: v30.48,130.81 30.48,144.78 27.31,147.95 R15.2 27.63,149.07 29.05,150.5 36.83,150.5 JP6.4
  Top 0.406: U2.7 19.69,129.87 19.98,130.15 22.83,130.15 23.5,130.81 v24.13,130.81 | U1.7 19.13,140.03 20.07,139.09 22.2,139.09 22.86,138.43 v22.86,134.62
  Bottom 0.305: 32.39,127.63 30.48,129.54 | 32.7,127.32 32.39,127.63 | 32.7,127.32 33.02,127 | 32.39,127.32 32.39,127.63 | 32.39,127.32 32.39,127 32.7,127.32 | 31.75,127 32.07,127 32.39,127.32
  Bottom 0.406: JP6.4 JP6.3 | 33.02,127 32.39,127 31.75,127 25.08,127 24.13,127.95 v24.13,130.81 24.13,133.35 v22.86,134.62 | 33.02,127 U3.18/A4 | 33.02,127 30.48,129.54 v30.48,130.81
SDA_3V1
  Top 0.406: JP5.4 22.96,150.6 24.61,150.6 25.93,151.92 R15.1
STB1
  Top 0.305: R18.2 44.92,137.79 U4.8
TC_OUT  (via drill 0.35)
  Top 0.406: U1.13 11.88,140.97 v10.16,140.97 | U2.13 14.27,130.51 v13.97,130.81
  Bottom 0.406: v10.16,140.97 8.89,139.7 8.89,138.43 10.16,137.16 21.59,137.16 | 21.59,137.16 30.48,137.16 31.75,138.43 U3.8 | v13.97,130.81 13.97,133.35 14.63,134.01 17.78,134.01 18.44,134.01 21.59,137.16
UV1
  Top 0.254: R23.2 14.97,85.36 13.33,87 13.33,88.27 12.88,88.72 U5.UV1
  Top 0.406: R23.2 18.63,85.36 R22.1
UV2
  Top 0.254: U5.UV2 13.52,89.72 14.24,90.44 R26.2
  Top 0.406: R25.1 16.78,90.17 R26.2
VIN  (via drill 0.35)
  Top 0.61: U4.3 v38.42,133.35 37.15,133.35 36.95,133.07 C4.1
  Top 1.27: U3.VIN 55.25,125.09 JP4.1
  Bottom 0.61: U3.VIN 53.83,125.73 52.59,126.97 39.71,126.97 38.42,128.27 v38.42,133.35
VS1  (via drill 0.35)
  Top 0.254: U5.VS1 4.84,88.72 C9.1 4.66,89.07 3.56,90.17 1.91,90.17 1.27,90.81 1.27,93.98 3.81,96.52 v7.3,96.52 | Q11.S@1 35.37,72.58 v35.56,72.39
  Bottom 0.254: v35.56,72.39 33.02,69.85 33.02,64.77 33.66,64.13 38.1,64.13 43.18,69.22 43.18,91.44 40.64,93.98 24.13,93.98 22.86,92.71 16.51,92.71 12.06,97.16 7.94,97.16 v7.3,96.52
  pour Top (no thermals): 34.61,76.2 36.19,76.2 36.19,68.58 34.61,68.58
VS2  (via drill 0.35)
  Top 0.254: U5.VS2 7.82,89.72 7.58,89.96 7.58,90.21 6.35,91.44 C10.1 4.66,92.61 5.72,93.66 v7.94,93.66
  Top 0.406: Q13.S@1 35.37,86.55 v35.56,86.36
  Bottom 0.254: v35.56,86.36 36.83,87.63 36.83,90.17 34.92,92.07 24.45,92.07 23.71,91.34 15.02,91.34 11.75,94.62 10.48,94.62 9.53,93.66 v7.94,93.66
  pour Top (no thermals): 34.61,90.17 36.19,90.17 36.19,82.55 34.61,82.55
WALL  (via drill 0.35)
  Top 0.254: U5.V1 9.66,86.18 8.25,84.77 5.82,84.77 5.08,84.03 C7.1
  Top 0.406: R22.2 21.74,82.7 v20.32,81.28 19.05,80.01 7.62,80.01 6.98,80.65 6.98,82.55 6.14,83.4 C7.1 | v39.37,72.39 39.37,70.11 Q10.D@5
  Bottom 0.406: v39.37,72.39 39.37,76.2 38.1,77.47 24.13,77.47 v20.32,81.28
  pour Top (no thermals): 48.89,67.31 37.47,67.31 36.83,67.94 36.83,71.12 44.13,78.42 48.89,78.42 49.53,77.79 49.53,67.94
WARNING_OUT  (via drill 0.35)
  Top 0.406: U1.8 19.34,140.67 20.32,139.7 25.4,139.7 | U3.10 25.4,139.7 | U2.8 18.75,130.51 20.32,132.08 v26.67,132.08 | v26.67,134.62 25.4,135.89 25.4,139.7
  Bottom 0.406: v26.67,132.08 27.31,132.08 27.94,132.72 27.94,133.35 v26.67,134.62
(copper drawn outside any net)
  shapes: Top area x3

## Text on the board
tPlace: ARVP BATTERY VOLTAGE MONITORING | REV 1.2 12/2017 | M. Blenkinsopp | E Battery | WALL
tNames: I2C | I2C / PWR | 3V3 | SDA | SCL | 3V3 | SCL | SDA | GND | 3V3 | SHORT JP4 / WHEN USB NOT / IN USE | H | CAN | L | S | + / E.B / - | + / W / - | + / PB / - | + / M / - | + / B2 / - | + / M / - | + / B3 / - | + / M / - | + / B4 / - | MAX 40A/BATTERY
bNames: S | CAN | L | H